# Altium PCB TelematicsBoardV1.PcbDoc
Units mm, origin at the board's own origin, x right, y up, seen from the top; angles counter-clockwise.
Board outline 68.4 x 70.55 mm, 2 copper layers (Top Layer, Bottom Layer); 24 components, 25 nets, 148 pads, 13 vias.
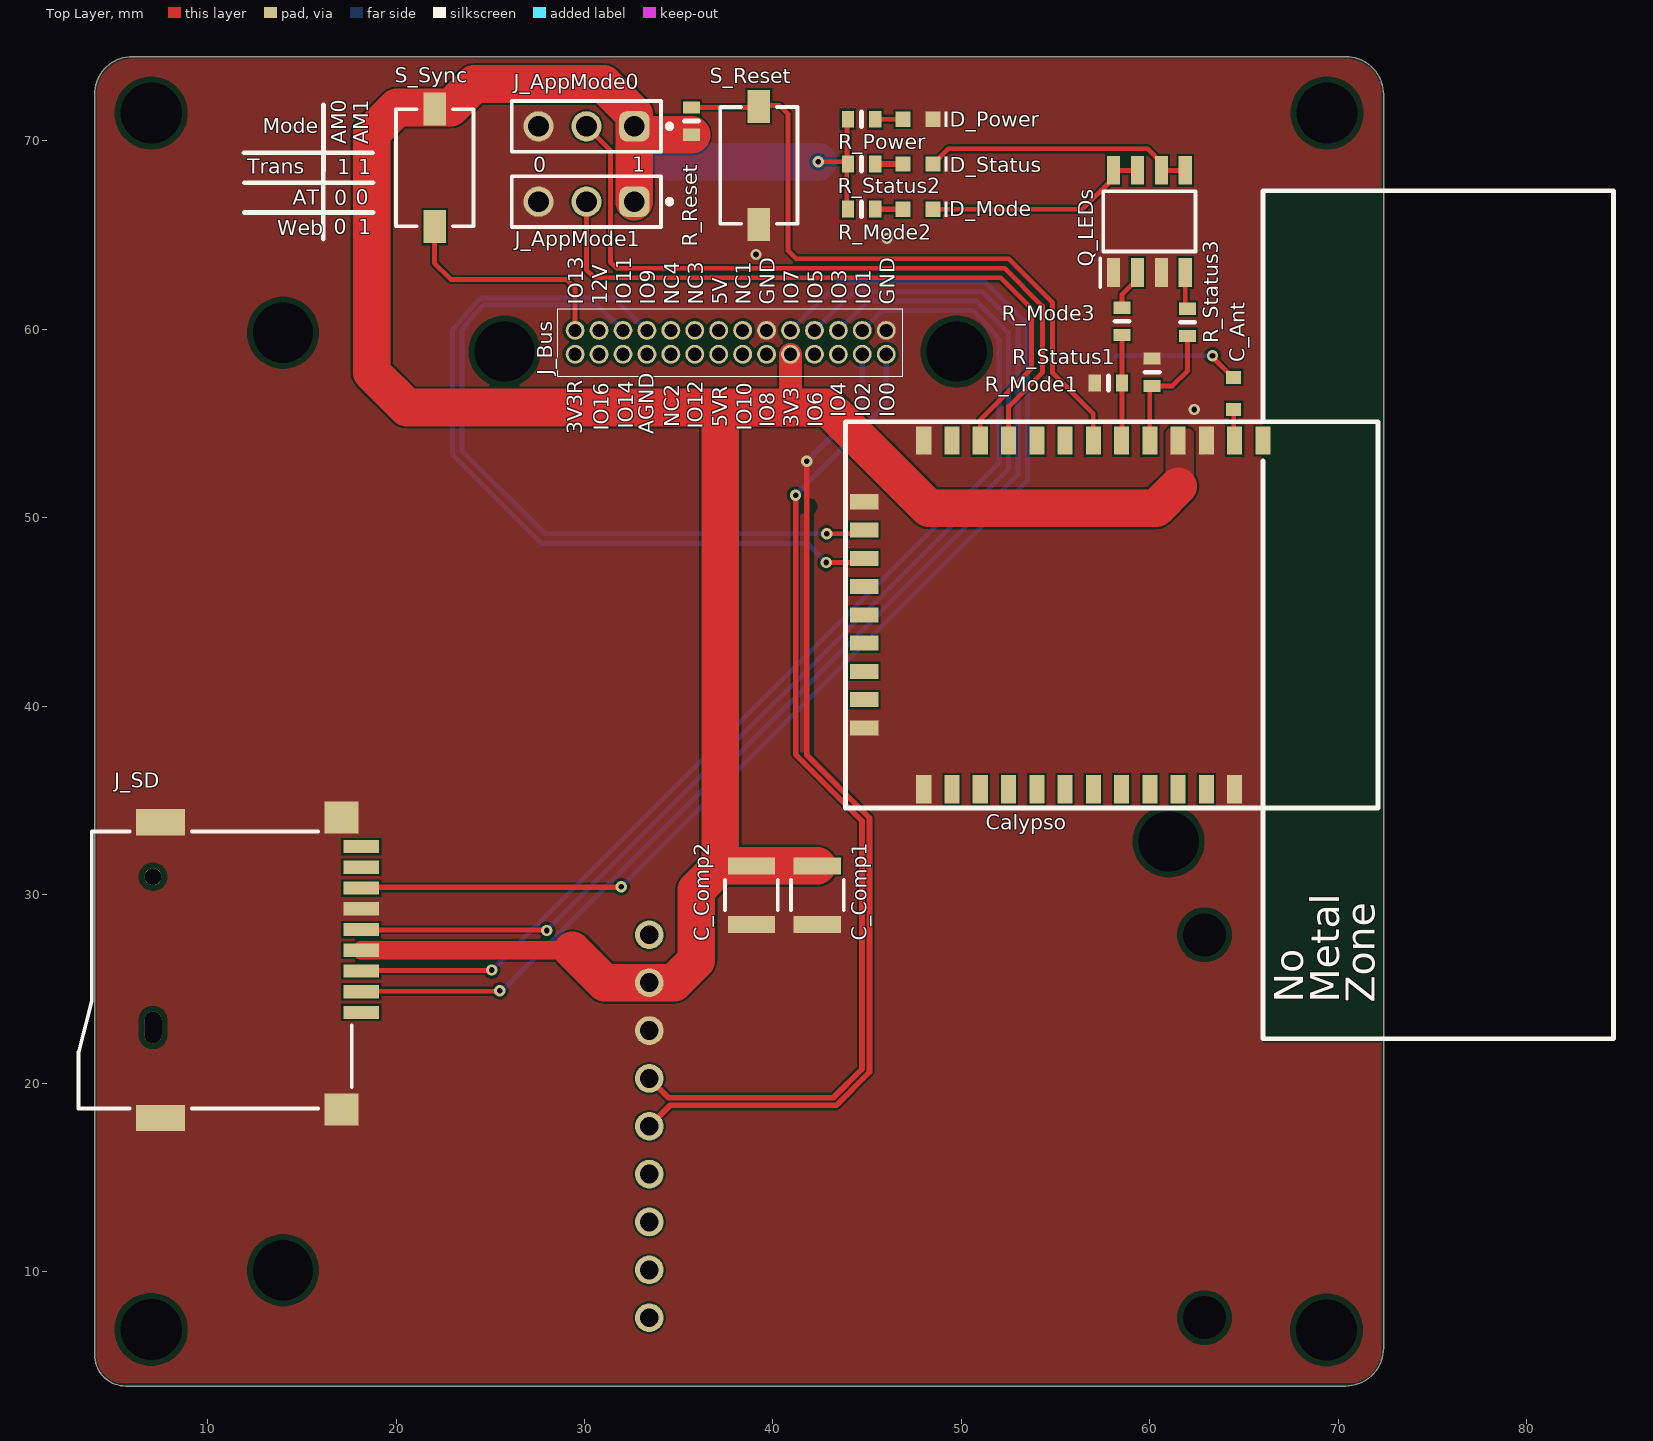
[diagram p0: Top Layer view]
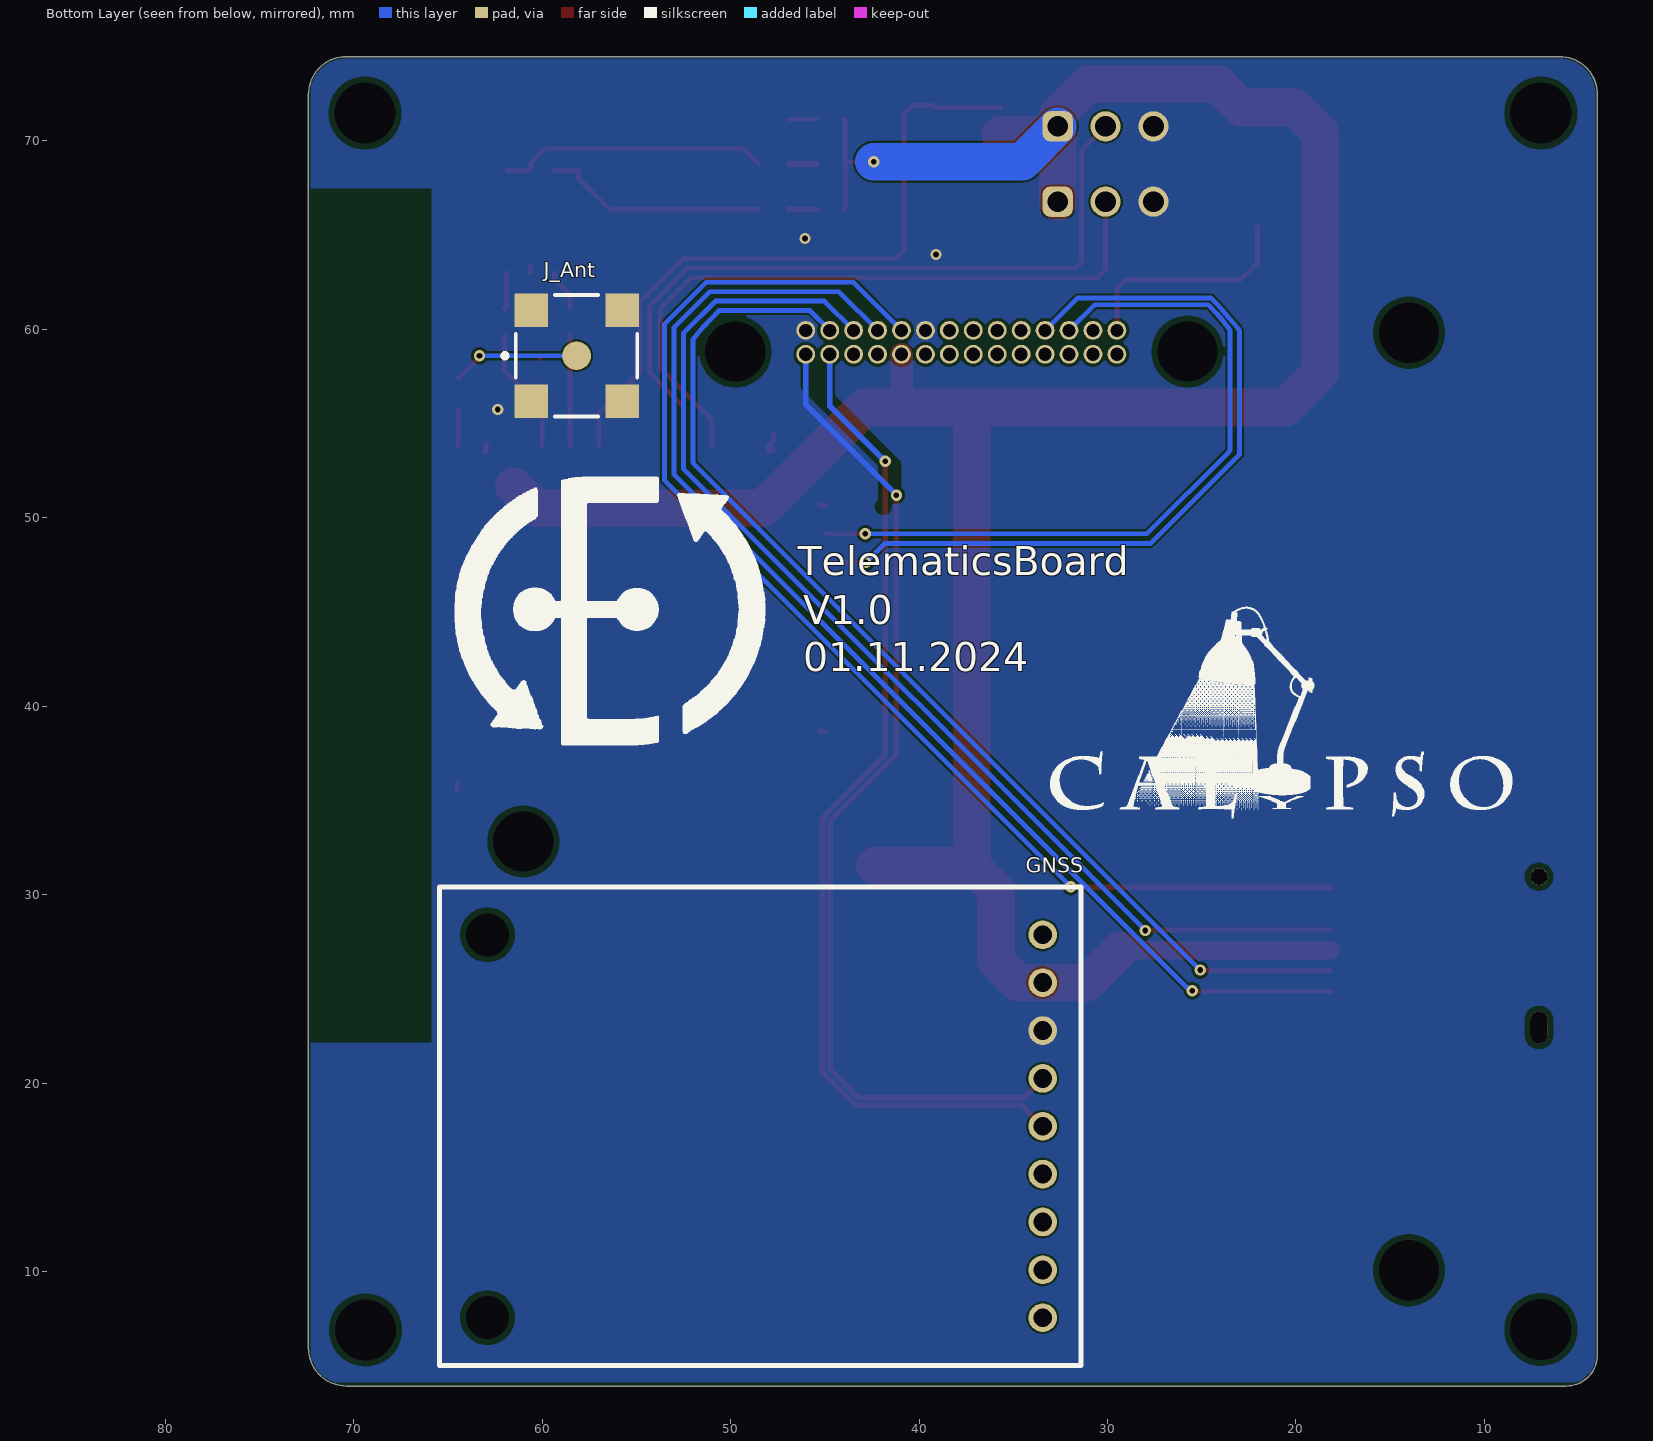
[diagram p1: Bottom Layer view, seen from below]
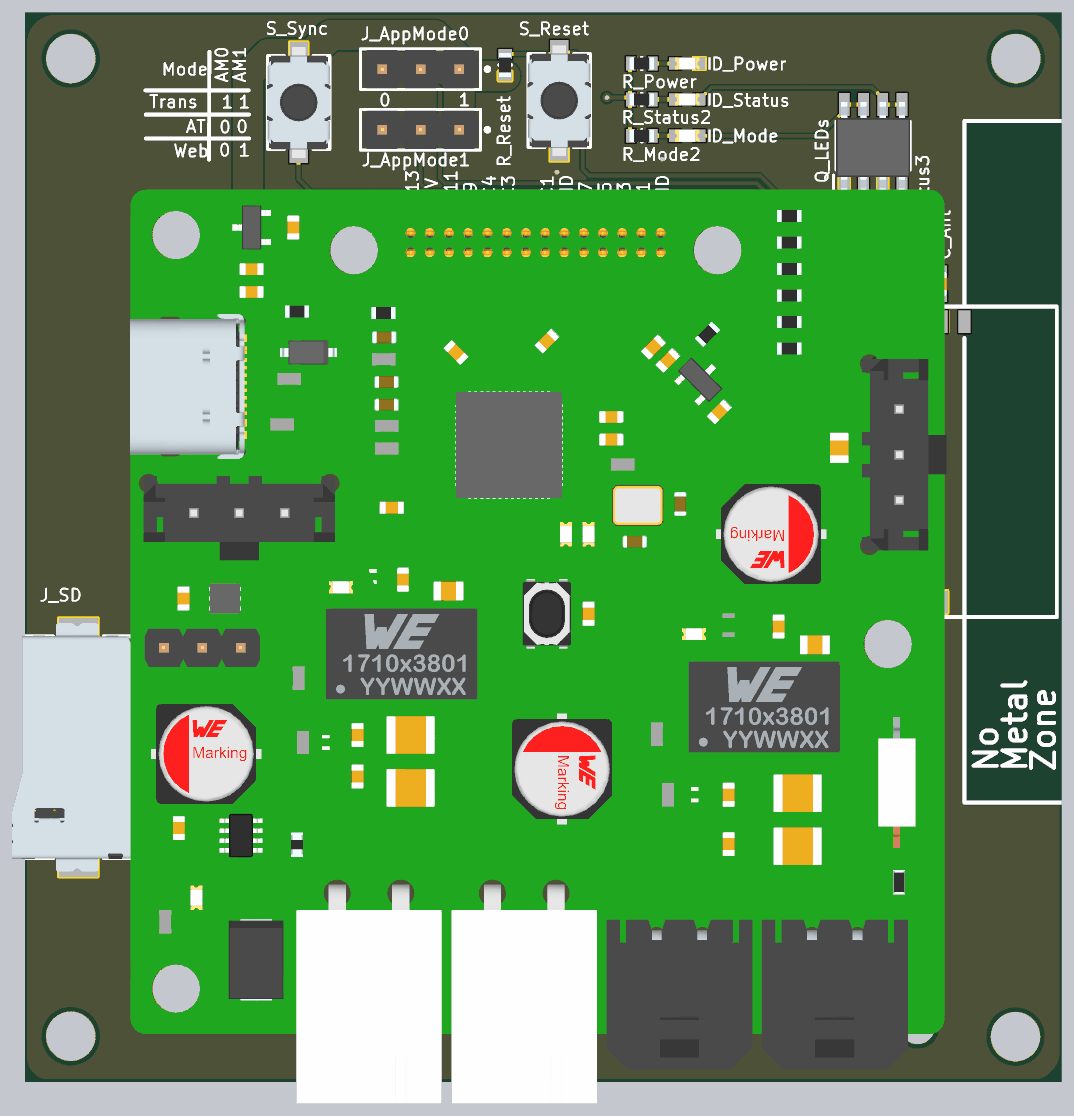
[diagram p2: 3D render of the assembled board from above, using the file's embedded part models]

## Layer stack, top to bottom
Top Solder: solder mask 0.0102, Solder Resist, Dk 3.5
Top Layer: signal copper 0.0356
Dielectric 1: dielectric 0.32, FR-4, Dk 4.8
Bottom Layer: signal copper 0.0356
Bottom Solder: solder mask 0.0102, Solder Resist, Dk 3.5

## Board outline
70.4,3.925 ccw(c70.4,5.925) 72.4,5.925 72.4,72.475 ccw(c70.4,72.475) 70.4,74.475 6,74.475 ccw(c6,72.475) 4,72.475 4,5.575 ccw(c5.65,5.575) 5.65,3.925

## Design rules (kind name [scope] priority, off if disabled: settings)
BoardOutlineClearance [(OnLayer('Bottom Layer') OR OnLayer('Top Layer'))] p1: gap=0.3 ignorepadtopadclearanceinfootprint=FALSE except(0: Arc-OutlineEdge Arc-CavityEdge Arc-CutoutEdge Arc-SplitBarrior Arc-SplitContinuation Text-OutlineEdge Text-CavityEdge Text-CutoutEdge Text-SplitBarrior Text-SplitContinuation; 0.1: Fill-OutlineEdge Fill-CavityEdge Fill-CutoutEdge Fill-SplitBarrior Fill-SplitContinuation Poly-OutlineEdge Poly-CavityEdge Poly-CutoutEdge Poly-SplitBarrior Poly-SplitContinuation Region-OutlineEdge Region-CavityEdge Region-CutoutEdge Region-SplitBarrior Region-SplitContinuation; 0.2: Via-OutlineEdge Via-CavityEdge Via-CutoutEdge Via-SplitBarrior Via-SplitContinuation)
Clearance [All] p1: gap=0.1 ignorepadtopadclearanceinfootprint=FALSE except(0.01: Text-Text Text-Hole; 0.09: SMDPad-SMDPad; 0.3: Arc-Hole Track-Hole SMDPad-Hole THPad-Hole Fill-Hole Poly-Hole Region-Hole)
HoleSize [All] p1: absolutevalues=TRUE maxlimit=5.3 minlimit=0.3 maxpercent=80.000 minpercent=20.000
MinimumAnnularRing [All] p1: minimumring=0.15
MinimumSolderMaskSliver [All] p1: minsoldermaskwidth=0.046
PlaneConnect [All] p1: planeconnectstyle=Direct reliefexpansion=0.508 reliefentries=4 reliefconductorwidth=0.254 reliefairgap=0.254
PolygonConnect [All] p1: connectstyle=Direct reliefconductorwidth=0.35 reliefentries=4 polygonreliefangle="90 Angle" airgapwidth=0.25
RoutingVias [All] p1: holewidth=0.3 width=0.6 viastyle="Through Hole" minholewidth=0.3 minwidth=0.6 maxholewidth=0.3 maxwidth=0.6
SilkToSilkClearance [All] p1: silktosilkclearance=0.01
SilkToSolderMaskClearance [IsPad] p1: minsilkscreentomaskgap=0.05 clearancetoexposedcopper=TRUE
SolderMaskExpansion SolderMaskExpansion_Via [IsVia] p1: expansion=0.102 istentingtop=TRUE
SolderMaskExpansion [All] p2: expansion=0.102 istentingtop=FALSE
UnRoutedNet [All] p1: checkbadconnections=TRUE
Width [All] p1: maxlimit=2 minlimit=0.15 preferedwidth=0.3
24 further rules are at their usual default settings.

## Components (designator, comment, footprint, x,y, rotation, side; value= is the part's Value field where it differs from the comment)
C_Ant "885012006053" WCAP-CSGP_0603_L1.6W0.8H0.8_Wave 64.45,56.6 r90 top
C_Comp1 "47u" WCAP-CSGP_1210_L3.2W2.5H2.5 42.35,29.976 r90 top
C_Comp2 "47u" WCAP-CSGP_1210_L3.2W2.5H2.5 38.85,29.976 r90 top
Calypso "Calypso" Calypso-Footprint-1 66,54 r180 top locked
D_Mode "150060YS75000" WL-SMCW_0603_150060xx75000 47.7,66.375 r180 top
D_Power "150060RS75000" WL-SMCW_0603_150060xx75000 47.7,71.15 r180 top
D_Status "150060VS75000" WL-SMCW_0603_150060xx75000 47.7,68.775 r180 top
GNSS "Ultimate GPS" "Ultimate GPS-Footprint-1" 31.404,5.01 r90 bottom locked
J_Ant "73251-1350" FP-73251-1350-MFG 58.175,58.6 r180 bottom
J_AppMode0 "61300311121" 61300311121 30.1,70.775 r180 top
J_AppMode1 "61300311121" 61300311121 30.1,66.775 r180 top
J_Bus "BusInterfaceV2_0" BusInterfaceV2_0 64.75,7.07 r90 top locked
J_SD "693071020811" 693071020811 10.4,26 r270 top
Q_LEDs "IRF7313TRPBFXTMA1" SOIC127P600X175-8N 59.975,65.725 r90 top
R_Mode1 "0603_100k" R_0603 57.8,57.15 r0 top
R_Mode2 "0603_2k2" R_0603 44.7,66.375 r180 top
R_Mode3 "0603_220R" R_0603 58.525,60.425 r90 top
R_Power "0603_2k2" R_0603 44.7,71.15 r180 top
R_Reset "0603_4k7" R_0603 35.675,71.05 r90 top
R_Status1 "0603_100k" R_0603 60.125,57.725 r270 top
R_Status2 "0603_2k2" R_0603 44.7,68.775 r180 top
R_Status3 "0603_220R" R_0603 62,60.375 r90 top
S_Reset "434781025816" WS-TASV_L6.2W4.1H2.5_4347x10258x6 39.25,68.7 r270 top
S_Sync "434781025816" WS-TASV_L6.2W4.1H2.5_4347x10258x6 22.05,68.575 r270 top

## Footprints (in the part's own frame and the unit in brackets; to place one, negate y for a bottom-side part, rotate by r counter-clockwise, add the part's x,y. Pads: shape width x height; smd on the part's side, far side on the other; paste and mask are expansions set on the pad)
61300311121 [mm] "Pin Header, pitch 2.54 mm, THT, Vertical, single row, 3p"
  rrect50% 1.6x1.6 hole 1.1: 1(-2.54,0)
  round 1.6 hole 1.1: 2(0,0) 3(2.54,0)
  silkscreen extent -4.53,-1.35 3.96,1.35, body extent -3.81,-1.27 3.81,1.27, height 8.57
693071020811 [mm] "Micro SD Card Connector Push & Push - with Card Detection - 8 Pins"
  rect 0.7x1.9 smd: 1(2.25,7.75) 2(1.15,7.75) 3(0.05,7.75) 4(-1.05,7.75) 5(-2.15,7.75) 6(-3.25,7.75) 7(-4.35,7.75) 8(-5.45,7.75) 9(-6.55,7.75)
  rect 1.7x1.8 smd: 10(-8.1,6.7) 11(7.4,6.7)
  rect 1.4x2.6 smd: 12(-7.85,-2.9) 13(7.85,-2.9)
  round 0.9 hole 0.9 unplated: MH1(-4.95,-3.3)
  oval 1.7x0.9 hole 0.9 slot 1.7 at 0 deg unplated: MH2(3.05,-3.3)
  silkscreen extent -7.35,-7.25 7.35,7.25, body extent -8.2,-7.3 8.2,7.73, height 1.85
BusInterfaceV2_0 [mm]
  round 1 hole 0.7: 1(52.875,18.74) 2(51.605,18.74) 3(52.875,20.01) 4(51.605,20.01) 5(52.875,21.28) 6(51.605,21.28) 7(52.875,22.55) 8(51.605,22.55) 9(52.875,23.82) 10(51.605,23.82) 11(52.875,25.09) 12(51.605,25.09) 13(52.875,26.36) 14(51.605,26.36) 15(52.875,27.63) 16(51.605,27.63) 17(52.875,28.9) 18(51.605,28.9) 19(52.875,30.17) 20(51.605,30.17) 21(52.875,31.44) 22(51.605,31.44) 23(52.875,32.71) 24(51.605,32.71) 25(52.875,33.98) 26(51.605,33.98) 27(52.875,35.25) 28(51.605,35.25)
  round 0 hole 3.2: ""(3,50.75) ""(25.75,3.75) ""(51.75,15) ""(51.75,39) ""(52.75,50.75)
  silkscreen extent 50.43,17.86 54.03,36.16, body extent -4.6,-0.07 55.75,53.82, height 17.33
Calypso-Footprint-1 [mm]
  rect 0.8x1.5 smd: 1(0,-0.1) 2(1.5,-0.1) 3(3,-0.1) 4(4.5,-0.1) 5(6,-0.1) 6(7.5,-0.1) 7(9,-0.1) 8(10.5,-0.1) 9(12,-0.1) 10(13.5,-0.1) 11(15,-0.1) 12(16.5,-0.1) 13(18,-0.1) 23(18,18.4) 24(16.5,18.4) 25(15,18.4) 26(13.5,18.4) 27(12,18.4) 28(10.5,18.4) 29(9,18.4) 30(7.5,18.4) 31(6,18.4) 32(4.5,18.4) 33(3,18.4) 34(1.5,18.4)
  rect 1.5x0.8 smd: 14(21.15,3.15) 15(21.15,4.65) 16(21.15,6.15) 17(21.15,7.65) 18(21.15,9.15) 19(21.15,10.65) 20(21.15,12.15) 21(21.15,13.65) 22(21.15,15.15)
  silkscreen extent -18.6,-13.35 22.15,31.65, body extent -6.05,-0.9 21.95,19.2, height 3
FP-73251-1350-MFG [mil]
  round 60 smd paste+0 mask+0: 1(0,0)
  rect 70x70 smd paste+0 mask+0: 2(-95,95) 3(95,95) 4(-95,-95) 5(95,-95)
  silkscreen extent -155,-127 127,127, body extent -125,-125 125,125, height 380
R_0603 [mm]
  rect 0.65x0.9 smd: 1(-0.725,0) 2(0.725,0)
  silkscreen extent 0,-0.38 0,0.38, body extent -0.8,-0.4 0.8,0.4, height 0.45
SOIC127P600X175-8N [mm]
  rect 1.525x0.7 smd: 1(-2.712,1.905) 2(-2.712,0.635) 3(-2.712,-0.635) 4(-2.712,-1.905) 5(2.712,-1.905) 6(2.712,-0.635) 7(2.712,0.635) 8(2.712,1.905)
  silkscreen extent -3.47,-2.45 1.6,2.61, body extent -3.13,-2.45 2.87,2.45, height 1.75
"Ultimate GPS-Footprint-1" [mil]
  round 60 hole 39.37 mask+0: 3V3(100,80) EN(200,80) FIX(400,80) GND(700,80) PPS(900,80) RX(600,80) TX(500,80) VBAT(300,80) VIN(800,80)
  round 0 hole 90 mask+0: Hole1(100,1240) Hole2(900,1240)
  silkscreen extent 0,0 1000,1340
WCAP-CSGP_0603_L1.6W0.8H0.8_Wave [mm] "Ceramic Capacitors, 0603, body 1.6x0.8mm"
  rect 0.7x0.8 smd: 1(-0.85,0) 2(0.85,0)
  body extent -0.8,-0.4 0.8,0.4, height 0.8
WCAP-CSGP_1210_L3.2W2.5H2.5 [mm] "Ceramic Capacitors, body 3.2x2.5mm"
  rect 0.9x2.5 smd: 1(-1.55,0) 2(1.55,0)
  silkscreen extent -0.8,-1.4 0.8,1.4, body extent -1.6,-1.25 1.6,1.25, height 2.5
WL-SMCW_0603_150060xx75000 [mm] "SMD Mono-color Chip LED, body 1.6x0.8mm"
  rect 0.8x0.8 smd: 1(-0.8,0) 2(0.8,0)
  silkscreen extent -1.55,-0.4 -1.4,0.4, body extent -0.8,-0.4 0.8,0.4, height 0.7
WS-TASV_L6.2W4.1H2.5_4347x10258x6 [mm] "SMT IP67 Tact Switch"
  rect 1.75x1.2 smd: 1(-3.125,0) 2(3.125,0)
  silkscreen extent -3.1,-2.05 3.1,2.05, body extent -3.65,-2.1 3.65,2.1, height 2.5

## Part data
C_Ant: library part CMP-006-000022-1, "WCAP-CSGP Multilayer Ceramic Chip Capacitor, General Purpose, size 0603, NP0, 22pF, 50VDC", Capacitance=22pF, Capacitance Tolerance=+/-5%, Case/Size Code=0603, Insulation Resistance=10GOhm, Manufacturer="Wurth Elektronik", Operating Temperature Max=125°C, Operating Temperature Min=-55°C, Rated Voltage (DC)=50V, Category="Multilayer Ceramic Chip Capacitors", Ceramic Type=NP0, Component Type=Standard, ComponentLink1Description="Website Link", ComponentLink1URL=https://www.we-online.com/redexpert/article/885012006053?ad, ComponentLink2Description="Datasheet Link", ComponentLink2URL=https://www.we-online.com/redexpert/spec/885012006053?ad, Design Item ID=885012006053, Height=0.8mm, Length=1.6mm, Manufacturer Part Number=885012006053, Match Code=WCAP-CSGP, Mount="Surface Mount", Packaging="Tape and Reel", Pin Count=2, Q Factor=840, Source=DefaultCeramicCaps.SchLib, Technical Reference=NP00603220J050DFCT10000, Width=0.8mm
C_Comp1 C_Comp2: library part CMP-006-000009-1, "WCAP-CSGP Multilayer Ceramic Chip Capacitor, General Purpose, size 1210, X5R, 47uF, 16VDC", Capacitance=47µF, Capacitance Tolerance=+/-20%, Case/Size Code=1210, Insulation Resistance=0.002GOhm, Manufacturer="Wurth Elektronik", Manufacturer Part Number=885012109011, Operating Temperature Max=85°C, Operating Temperature Min=-55°C, Rated Voltage (DC)=16V, Category="Multilayer Ceramic Chip Capacitors", Ceramic Type=X5R, Component Type=Standard, ComponentLink1Description="Website Link", ComponentLink1URL=https://www.we-online.com/redexpert/article/885012109011?ad, ComponentLink2Description="Datasheet Link", ComponentLink2URL=https://www.we-online.com/redexpert/spec/885012109011?ad, Design Item ID=885012109011, Dissipation Factor=10%, Height=2.5mm, Length=3.2mm, Match Code=WCAP-CSGP, Mount="Surface Mount", Packaging="Tape and Reel", Pin Count=2, Source=DefaultCeramicCaps.SchLib, Technical Reference=X5R1210476M016DFCT10000, Width=2.5mm
Calypso: library part CMP-002-000002-4, "WIRL-WIFS Calypso WIFI module", Manufacturer="Wuerth Elektronik", Manufacturer Part Number=2610011025000, MF=Würth, MF-PartNumber=2610011025000, Pin Count=34, Source=https://www.we-online.com/components/products/datasheet/2610011025000.pdf
D_Mode: library part CMP-008-000003-1, "WL-SMCW Mono-color Chip LED Waterclear, size 0603, Yellow, 2V, 140°", Case/Size Code=0603, Emitting Color=Yellow, Forward Voltage=2V, Manufacturer="Wurth Elektronik", Operating Temperature Max=85°C, Operating Temperature Min=-40°C, Category="Signal LEDs", Chip Technology=AlInGaP, Component Type=Standard, ComponentLink1Description="Website Link", ComponentLink1URL=https://www.we-online.com/redexpert/article/150060YS75000?ad, ComponentLink2Description="Datasheet Link", ComponentLink2URL=https://www.we-online.com/redexpert/spec/150060YS75000?ad, Design Item ID=150060YS75000, Dominant Wavelength=590nm, Height=0.7mm, Length=1.6mm, Luminous Intensity=120mcd, Manufacturer Part Number=150060YS75000, Match Code=WL-SMCW, Mount="Surface Mount", Packaging="Tape and Reel", Peak Wavelength=595nm, Pin Count=2, Source=Diodes.SchLib, Viewing Angle=140°, Width=0.8mm
D_Power: library part CMP-008-000001-1, "WL-SMCW Mono-color Chip LED Waterclear, size 0603, Red, 2V, 140°", Case/Size Code=0603, Emitting Color=Red, Forward Voltage=2V, Manufacturer="Wurth Elektronik", Operating Temperature Max=85°C, Operating Temperature Min=-40°C, Category="Signal LEDs", Chip Technology=AlInGaP, Component Type=Standard, ComponentLink1Description="Website Link", ComponentLink1URL=https://www.we-online.com/redexpert/article/150060RS75000?ad, ComponentLink2Description="Datasheet Link", ComponentLink2URL=https://www.we-online.com/redexpert/spec/150060RS75000?ad, Design Item ID=150060RS75000, Dominant Wavelength=625nm, Height=0.7mm, Length=1.6mm, Luminous Intensity=250mcd, Manufacturer Part Number=150060RS75000, Match Code=WL-SMCW, Mount="Surface Mount", Packaging="Tape and Reel", Peak Wavelength=630nm, Pin Count=2, Source=Diodes.SchLib, Viewing Angle=140°, Width=0.8mm
D_Status: library part CMP-008-000002-1, "WL-SMCW Mono-color Chip LED Waterclear, size 0603, Bright Green, 2V, 140°", Case/Size Code=0603, Emitting Color="Bright Green", Forward Voltage=2V, Manufacturer="Wurth Elektronik", Operating Temperature Max=85°C, Operating Temperature Min=-40°C, Category="Signal LEDs", Chip Technology=AlInGaP, Component Type=Standard, ComponentLink1Description="Website Link", ComponentLink1URL=https://www.we-online.com/redexpert/article/150060VS75000?ad, ComponentLink2Description="Datasheet Link", ComponentLink2URL=https://www.we-online.com/redexpert/spec/150060VS75000?ad, Design Item ID=150060VS75000, Dominant Wavelength=570nm, Height=0.7mm, Length=1.6mm, Luminous Intensity=40mcd, Manufacturer Part Number=150060VS75000, Match Code=WL-SMCW, Mount="Surface Mount", Packaging="Tape and Reel", Peak Wavelength=572nm, Pin Count=2, Source=Diodes.SchLib, Viewing Angle=140°, Width=0.8mm
GNSS: library part CMP-002-000003-1, "GPS Board by adafruit", Manufacturer=Adafruit, Manufacturer Part Number=746
J_Ant: library part CMP-04764-000006-1, "CONN SMA JACK STR 50 OHM SMD", Frequency=18GHz, Manufacturer=Molex, Temperature="-65°C to +165°C", Temperature Range High=+165°C, Temperature Range Low=-65°C, Voltage Rating=500V, Automotive=No, Category=Conn, ComponentLink2Description=Datasheet, ComponentLink2URL=https://www.molex.com/pdm_docs/sd/732511350_sd.pdf, Conn Orientation=Straight, Contact Material=Gold, Device Class L1=Connectors, Device Class L2="RF / Coaxial Connectors", Device Class L3=unset, Digikey Description="CONN SMA JACK STR 50 OHM SMD", Footprint Url=https://forum.upverter.com/uploads/default/original/3X/d/a/daeafa2ce4908d4fc4e49f0b17d7d2c986fce444.pdf, Height=9.655mm, Impedance=50Ω, Is Female=yes, Lead Free=Yes, Manufacturer Part Number=73251-1350, Mouser Description="RF Connectors / Coaxial Connectors SMA ST PCB-JCK STD SMT", Number Of Contacts=1, Octopart=https://octopart.com/73251-1350-molex-5414390, Package=73251-1350, RoHS=TRUE, Shielding=true, Standoff Height=0.41mm
J_AppMode0 J_AppMode1: library part CMP-1502-01062-3, Color=Black, Contact Resistance=20mΩ, Current Rating=3A, Manufacturer="Wuerth Elektronik", Max Operating Temperature=105°C, Min Operating Temperature=-40°C, Operating Supply Voltage=250V, Connector Type="Male Pin", Contact Material=Copper, Contact Mating Length=5.9944mm, Contact Plating=Gold, Gender=Male, Height=8.94mm, Lead Free="Lead Free", Lead Pitch=2.54mm, Manufacturer Part Number=61300311121, Mount="Through Hole", NexarPartId=32855521, Number Of Contacts=3, Number of Pins=3, Number of Positions=3, Number of Rows=1, Orientation=Vertical, Packaging=Bulk, Pitch=2.54mm, REACH SVHC=Unknown, RoHS=Compliant, Termination=Solder, Voltage Rating=250V
J_Bus: library part CMP-012-000011-1, "62202821121 needs to be soldered on the PCB", Manufacturer="Wuerth Elektronik", Manufacturer Part Number=62202821121, Component Type=Standard, Design Item ID=BusInterfaceV2_0, Manufacturer_Name="Wuerth Elektronik", Manufacturer_Part_Number=62202821121, Pin Count=28, Source=Ecogenium_Default_SchLibSchLib.SchLib
J_SD: library part CMP-03913-107725714-1, "693071020811 Micro Sd Card, Push-Push, 8Pos, Smt Rohs Compliant: Yes", Current Rating=500mA, Insulation Resistance=100MΩ, Manufacturer="Wuerth Elektronik", Max Operating Temperature=85°C, Min Operating Temperature=-40°C, Manufacturer Part Number=693071020811, NexarPartId=107725714, Number of Pins=8, Packaging="Tape and Reel", RoHS=Compliant
Q_LEDs: library part CMP-012-000004-1, "MOSFET PLANAR 40<-<100V / N Channel / Two Channel", Manufacturer=Infineon, Mouser Part Number=726-IRF7313TRPBFXTMA, Arrow Part Number=IRF7313TRPBFXTMA1, Arrow Price/Stock=https://www.arrow.com/en/products/irf7313trpbfxtma1/infineon-technologies-ag?region=europe, Component Type=Standard, Datasheet Link=https://www.mouser.co.uk/datasheet/2/196/Infineon_IRF7313_DataSheet_v01_01_EN-3224007.pdf, Design Item ID=IRF7313TRPBFXTMA1, Geometry.Height=1.75mm, Manufacturer Part Number=IRF7313TRPBFXTMA1, Manufacturer_Name=Infineon, Manufacturer_Part_Number=IRF7313TRPBFXTMA1, Mouser Price/Stock=https://www.mouser.co.uk/ProductDetail/Infineon-Technologies/IRF7313TRPBFXTMA1?qs=1Kr7Jg1SGW%2FUB%252Bqt0Ezjig%3D%3D, Pin Count=8, Source=ActiveComponents.SchLib
R_Mode1 R_Status1: library part CMP-010-000001-1, "100k Ohm, 0603.", Manufacturer=Royalohm, Manufacturer Part Number=0603WAJ0104T5E, Component Type=Standard, Design Item ID=0603_100k, Geometry.Height=0.5mm, Manufacturer_Name=Royalohm, Manufacturer_Part_Number=0603WAJ0104T5E, Pin Count=2, Source=Resistors.SchLib
R_Mode2 R_Power R_Status2: library part CMP-010-000012-1, "2,2k Ohm, 0603.", Manufacturer=Royalohm, Manufacturer Part Number=0603WAJ0222T5E, Component Type=Standard, Design Item ID=0603_2k2, Geometry.Height=0.5mm, Manufacturer_Name=Royalohm, Manufacturer_Part_Number=0603WAJ0222T5E, Pin Count=2, Source=Resistors.SchLib
R_Mode3 R_Status3: library part CMP-010-000010-1, "220 Ohm, 0603.", Manufacturer=Royalohm, Manufacturer Part Number=0603WAJ0221T5E, Component Type=Standard, Design Item ID=0603_220R, Geometry.Height=0.5mm, Manufacturer_Name=Royalohm, Manufacturer_Part_Number=0603WAJ0221T5E, Pin Count=2, Source=Resistors.SchLib
R_Reset: library part CMP-010-000016-1, "4,7k Ohm, 0603.", Manufacturer=Royalohm, Manufacturer Part Number=CQ03SAF4701T5E, Component Type=Standard, Design Item ID=0603_4k7, Geometry.Height=0.5mm, Manufacturer_Name=Royalohm, Manufacturer_Part_Number=CQ03SAF4701T5E, Pin Count=2, Source=Resistors.SchLib
S_Reset S_Sync: library part CMP-011-000002-1, "WS-TASV SMT IP67 Tact Switch, L6.2 x W4.1 x H2.5mm, 160g, SPST-NO, 12V, 50mA", Manufacturer="Wurth Elektronik", Operating Temperature Max=85°C, Operating Temperature Min=-40°C, Rated Current=50mA, Rated Voltage (DC)=12V, Category="Tact Switches", Circuit=SPST-NO, Component Type=Standard, ComponentLink1Description="Website Link", ComponentLink1URL=https://www.we-online.com/redexpert/article/434781025816?ad, ComponentLink2Description="Datasheet Link", ComponentLink2URL=https://www.we-online.com/redexpert/spec/434781025816?ad, Contact Material="Stainless Steel", Contact Plating=Silver, Design Item ID=434781025816, Height=2.5mm, Length=6.2mm, Manufacturer Part Number=434781025816, Match Code=WS-TASV, Mount="Surface Mount", Operation Force=160g, Packaging="Tape and Reel", Pin Count=2, Source=Electromechanical.SchLib, Terminal Material="Copper Alloy", Terminal Plating=Silver, Washable=Yes, Width=4.1mm

## Free pads (board coordinates)
  round 0 hole 3.25 mask+0: 2(7,6.925) 2(7,71.475) 2(69.375,6.9) 2(69.4,71.475)

## Via types
v1: diameter 0.6, hole 0.3, Top Layer to Bottom Layer, tented both sides, 13 vias

## Nets (pads, with @x,y where several pads share a name; then routed paths per layer and width w, separated by ;. In a path a pad name is that pad's centre, name@x,y a point inside that pad or via, vN(x,y) a via of type N, cw(c..) or ccw(c..) an arc to the next point about the centre after c; other vN are vias at no path point)
3V3: C_Comp1.2 C_Comp2.2 Calypso.4 GNSS.VIN J_AppMode0.1 J_AppMode1.1 J_Bus.10 J_SD.4 R_Mode2.2 R_Power.2 R_Reset.1 R_Status2.2 S_Sync.1 | length 156.5
  Top Layer w0.254: R_Reset.1@35.586,70.414 R_Reset.1 ; v1(42.4,68.9) 43.85,68.9 R_Status2.2@43.925,68.825 ; R_Mode2.2@43.95,66.375 43.913,66.412 43.913,68.738 43.875,68.775 R_Status2.2@43.925,68.825 ; R_Power.2 43.925,71.1 R_Status2.2@43.925,68.825
  Top Layer w1: J_SD.4 29.35,27.05
  Top Layer w1.2: 40.93,55.92 J_Bus.10
  Top Layer w2: 29.35,27.05 31.07,25.33 GNSS.VIN 34.753,25.33 35.925,26.502 35.925,30.251 37.2,31.526 ; J_AppMode1.1 J_AppMode0.1 ; R_Reset.1 33.09,70.325 J_AppMode0.1 ; 40.93,55.92 41,55.85 ; C_Comp1.2 C_Comp2.2 37.2,31.526 ; 61.5,51.672 60.328,50.5 48.275,50.5 42.925,55.85 41,55.85 ; J_AppMode0.1 32.64,71.403 31.018,73.025 24.15,73.025 22.9,71.775 20.051,71.775 18.7,70.424 18.7,57.725 20.575,55.85 37.2,55.85 ; 37.2,31.526 37.2,55.85 ; 37.2,55.85 41,55.85
  Bottom Layer w0.254: v1@42.375,68.875 v1(42.4,68.9)
  Bottom Layer w2: J_AppMode0.1 34.515,68.9 v1(42.4,68.9)
GND: C_Comp1.1 C_Comp2.1 Calypso.3 Calypso.13 Calypso.14 Calypso.22 Calypso.23 Calypso.34 D_Power.1 GNSS.GND J_Ant.2 J_Ant.3 J_Ant.4 J_Ant.5 J_AppMode0.3 J_AppMode1.3 J_Bus.1 J_Bus.11 J_SD.6 J_SD.10 J_SD.11 J_SD.12 J_SD.13 Q_LEDs.1 Q_LEDs.3 R_Mode1.1 R_Status1.1 S_Reset.2 | length 3.9
  Top Layer w0.254: Calypso.22@44.95,38.675 Calypso.22@45.3,38.675 ; Calypso.14@44.95,50.675 Calypso.14@45.3,50.675 ; Calypso.13@47.727,53.552 Calypso.13@48,53.825 ; Calypso.13@47.727,54.473 47.727,54.098 Calypso.13@48,53.825 ; Calypso.13@48,53.475 Calypso.13@48,53.825 ; Q_LEDs.1 Q_LEDs.1@58.07,63.425 ; R_Status1.1 R_Status1.1@60.133,58.458 ; Q_LEDs.3@60.61,63.425 Q_LEDs.3 Q_LEDs.3@60.617,63.006 ; Calypso.3@62.913,53.912 63,53.825 Calypso.3@63,53.475 ; Calypso.34@64.5,35.525 Calypso.34@64.5,35.875
  other v1: 62.35,55.75 39.1,63.975 46.05,64.825
NetC_Ant_1: C_Ant.1 Calypso.2 | length 1.9
  Top Layer w0.254: C_Ant.1 64.45,53.875 Calypso.2@64.5,53.825
NetC_Ant_2: C_Ant.2 J_Ant.1 | length 6.8
  Top Layer w0.254: v1(63.325,58.6) 63.325,58.525 64.4,57.45 C_Ant.2
  Bottom Layer w0.254: J_Ant.1@58.175,58.55 58.225,58.6 v1(63.325,58.6)
NetCalypso_5: Calypso.5 R_Status1.2 R_Status3.1 | length 7.3
  Top Layer w0.254: Calypso.5@60,53.825 60,56.875 R_Status1.2 61.2,57 62,57.8 R_Status3.1
NetCalypso_6: Calypso.6 R_Mode1.2 R_Mode3.1 | length 5.9
  Top Layer w0.254: Calypso.6@58.5,53.825 58.525,53.85 R_Mode1.2 R_Mode3.1
NetCalypso_7: Calypso.7 R_Reset.2 S_Reset.1 | length 36.3
  Top Layer w0.254: R_Reset.2 39.15,71.775 39.25,71.875 40.35,71.875 40.8,71.425 40.8,64.175 41.226,63.749 52.508,63.749 54.84,61.416 54.84,57.685 57,55.525 Calypso.7@57,53.825
NetCalypso_10: Calypso.10 J_AppMode0.2 | length 39.8
  Top Layer w0.254: J_AppMode0.2 31.375,69.5 31.375,63.575 31.709,63.241 52.297,63.241 54.3,61.238 54.3,57.7 52.5,55.9 Calypso.10@52.5,53.825
NetCalypso_11: Calypso.11 J_AppMode1.2 | length 36.5
  Top Layer w0.254: J_AppMode1.2 30.1,63.175 30.542,62.733 52.087,62.733 53.725,61.095 53.725,57.925 51,55.2 Calypso.11@51,53.825
NetCalypso_15: Calypso.15 J_Bus.23 | length 39.4
  Top Layer w0.254: v1(42.85,49.15) 44.925,49.15 Calypso.15@44.95,49.175
  Bottom Layer w0.254: J_Bus.23 30.753,61.232 30.679,61.306 24.651,61.306 24.577,61.232 ccw(c32.932,53.024) 23.55,60.035 ccw(c23.754,59.883) 23.5,59.885 23.5,53.559 23.574,53.484 27.909,49.15 v1(42.85,49.15)
NetCalypso_16: Calypso.16 J_Bus.21 | length 42.7
  Top Layer w0.254: v1(42.821,47.626) 44.901,47.626 Calypso.16@44.95,47.675
  Bottom Layer w0.254: J_Bus.21 31.597,61.658 31.589,61.66 24.505,61.66 24.43,61.586 24.327,61.482 24.283,61.439 24.198,61.35 ccw(c32.932,53.024) 23.758,60.861 23.084,60.072 23.035,59.989 23,59.93 23,59.861 23,53.34 27.698,48.642 41.805,48.642 v1(42.821,47.626)
NetD_Mode_1: D_Mode.1 Q_LEDs.7 Q_LEDs.8 | length 11.9
  Top Layer w0.254: D_Mode.1 56.42,66.375 58.07,68.025 Q_LEDs.8 Q_LEDs.7
NetD_Mode_2: D_Mode.2 R_Mode2.1 | length 1.5
  Top Layer w0.3: R_Mode2.1 D_Mode.2
NetD_Power_2: D_Power.2 R_Power.1 | length 1.5
  Top Layer w0.254: R_Power.1 D_Power.2
NetD_Status_1: D_Status.1 Q_LEDs.5 Q_LEDs.6 | length 14.4
  Top Layer w0.254: D_Status.1 49.306,69.581 59.879,69.581 60.61,68.849 Q_LEDs.6 Q_LEDs.5
NetD_Status_2: D_Status.2 R_Status2.1 | length 1.5
  Top Layer w0.3: R_Status2.1 D_Status.2
NetGNSS_RX: GNSS.RX J_Bus.2 | length 53.7
  Top Layer w0.3: GNSS.RX 34.461,19.225 43.2,19.225 44.725,20.75 44.725,33.909 41.2,37.434 v1@41.2,51.174
  Bottom Layer w0.3: v1@41.2,51.211 46.01,56.02 J_Bus.2
  other v1: 41.2,51.2
NetGNSS_TX: GNSS.TX J_Bus.4 | length 53.6
  Top Layer w0.3: GNSS.TX 34.551,18.825 43.366,18.825 45.125,20.584 45.125,34.075 41.8,37.4 v1(41.8,53)
  Bottom Layer w0.3: v1(41.8,53) 44.74,55.94 J_Bus.4
NetJ_Bus_3: J_Bus.3 J_SD.3 | length 59.9
  Top Layer w0.254: J_SD.3 18.175,25.975 25.052,25.975 v1(25.077,26)
  Bottom Layer w0.254: v1(25.077,26) 52,52.923 52,59.457 ccw(c44.284,53.707) 51.089,60.511 50.6,61 45.79,61 J_Bus.3@44.74,59.95
NetJ_Bus_5: J_Bus.5 J_SD.5 | length 62.1
  Top Layer w0.254: J_SD.5 18.175,28.125 27.968,28.125 v1(27.993,28.1)
  Bottom Layer w0.254: v1(27.993,28.1) 52.5,52.607 52.5,59.8 50.8,61.5 45.02,61.5 J_Bus.5@43.47,59.95
NetJ_Bus_7: J_Bus.7 J_SD.2 | length 66.5
  Top Layer w0.254: J_SD.2 18.175,24.825 18.225,24.875 25.475,24.875 v1(25.5,24.9)
  Bottom Layer w0.254: v1(25.5,24.9) 25.594,24.9 25.767,25.073 25.782,25.073 38.409,37.7 53,52.291 53,60.1 51.1,62 44.25,62 J_Bus.7@42.2,59.95
NetJ_Bus_9: J_Bus.9 J_SD.7 | length 67.2
  Top Layer w0.3: J_SD.7 18.187,30.387 31.912,30.387 v1(31.949,30.424)
  Bottom Layer w0.254: v1(31.949,30.424) 53.5,51.975 53.5,60.3 51.3,62.5 43.48,62.5 J_Bus.9@40.93,59.95
NetJ_Bus_27: J_Bus.27 S_Sync.2 | length 12.2
  Top Layer w0.254: S_Sync.2@22.032,65.499 22.032,63.518 22.9,62.65 29.025,62.65 29.5,62.175 J_Bus.27
NetQ_LEDs_2: Q_LEDs.2 R_Mode3.2 | length 2.2
  Top Layer w0.254: R_Mode3.2 58.525,61.856 59.046,62.377 59.117,62.377 59.34,62.6 Q_LEDs.2
NetQ_LEDs_4: Q_LEDs.4 R_Status3.2 | length 2
  Top Layer w0.254: Q_LEDs.4 61.88,61.22 R_Status3.2
pads on no net: Calypso.1 Calypso.8 Calypso.9 Calypso.12 Calypso.17 Calypso.18 Calypso.19 Calypso.20 Calypso.21 Calypso.24 Calypso.25 Calypso.26 Calypso.27 Calypso.28 Calypso.29 Calypso.30 Calypso.31 Calypso.32 Calypso.33 GNSS.3V3 GNSS.EN GNSS.FIX GNSS.Hole1 GNSS.Hole2 GNSS.PPS GNSS.VBAT J_Bus. J_Bus.6 J_Bus.8 J_Bus.12 J_Bus.13 J_Bus.14 J_Bus.15 J_Bus.16 J_Bus.17 J_Bus.18 J_Bus.19 J_Bus.20 J_Bus.22 J_Bus.24 J_Bus.25 J_Bus.26 J_Bus.28 J_SD.1 J_SD.8 J_SD.9 J_SD.MH1 J_SD.MH2

## Polygon pours and split planes (outlines as drawn)
GND on Top Layer "GND_L01_P003" (solid, pour order 3): 4.098,74.65 72.498,74.65 72.498,67.475 65.973,67.475 65.97,22.146 72.498,22.146 72.498,4.1 4.1,4.1 4.048,54.525
3V3 on Top Layer "3V3_L01_P000" (solid, pour order 0): 61.02,54.736 62.13,54.736 62.325,54.541 62.325,51.672 60.85,51.672 60.85,52.025 60.85,54.566
GND on Bottom Layer "GND_L02_P001" (solid, pour order 1): 3.992,74.65 72.392,74.65 72.392,67.475 65.867,67.475 65.864,22.146 72.392,22.146 72.392,4.125 3.994,4.125 3.942,54.525

## Silkscreen, mask and mechanical layers (free items; w line width, h text height)
Top Overlay:
  lines w0.254: 11.925,69.375 18.75,69.375 ; 11.95,66.2 18.775,66.2 ; 11.95,67.775 18.775,67.775 ; 16.131,64.8 16.153,71.925
  text "Mode" at 12.925,70.4 h0.8
  text "AM0" at 17.35,69.825 h0.8 r90
  text "AM1" at 18.525,69.825 h0.8 r90
  text "1" at 32.525,68.375 h0.8
  text "0" at 27.275,68.35 h0.8
  text "Trans" at 12.1,68.25 h0.8
  text "1" at 16.875,68.225 h0.8
  text "1" at 18,68.225 h0.8
  text "AT" at 14.525,66.625 h0.8
  text "0" at 17.85,66.6 h0.8
  text "0" at 16.725,66.575 h0.8
  text "0" at 16.7,65.05 h0.8
  text "1" at 18,65.05 h0.8
  text "Web" at 13.7,65 h0.8
  text "No" at 68.146,24.254 h1.52 r90
  text "Metal" at 70.046,24.254 h1.52 r90
  text "Zone" at 71.946,24.254 h1.52 r90
Bottom Overlay:
  drawing of 4613 lines, arcs and shapes, not listed
  text "TelematicsBoard" at 46.446,46.954 h1.52
  text "V1.0" at 46.146,44.354 h1.52
  text "01.11.2024" at 46.146,41.854 h1.52

## Text inside footprints (layer, text, board x,y; h text height)
Calypso: Top Overlay "No Metal Zone" at 93.154,59.846 h1.52 r270
J_Bus: Top Overlay "GND" at 46.45,61.295 h0.8 r90; Top Overlay "IO1" at 45.18,61.295 h0.8 r90; Top Overlay "IO3" at 43.91,61.295 h0.8 r90; Top Overlay "IO5" at 42.64,61.295 h0.8 r90; Top Overlay "IO7" at 41.37,61.295 h0.8 r90; Top Overlay "GND" at 40.1,61.295 h0.8 r90; Top Overlay "NC1" at 38.83,61.295 h0.8 r90; Top Overlay "5V" at 37.56,61.295 h0.8 r90; Top Overlay "NC3" at 36.29,61.295 h0.8 r90; Top Overlay "NC4" at 35.02,61.295 h0.8 r90; Top Overlay "IO9" at 33.75,61.295 h0.8 r90; Top Overlay "IO11" at 32.48,61.295 h0.8 r90; Top Overlay "12V" at 31.21,61.295 h0.8 r90; Top Overlay "IO13" at 29.94,61.295 h0.8 r90; Top Overlay "IO0" at 46.475,55.325 h0.8 r90; Top Overlay "IO2" at 45.175,55.325 h0.8 r90; Top Overlay "IO4" at 43.875,55.325 h0.8 r90; Top Overlay "IO6" at 42.64,54.795 h0.8 r90; Top Overlay "3V3" at 41.37,54.795 h0.8 r90; Top Overlay "IO8" at 40.1,54.795 h0.8 r90; Top Overlay "IO10" at 38.875,54.625 h0.8 r90; Top Overlay "5VR" at 37.56,54.795 h0.8 r90; Top Overlay "IO12" at 36.275,54.725 h0.8 r90; Top Overlay "NC2" at 35.02,54.795 h0.8 r90; Top Overlay "AGND" at 33.675,54.425 h0.8 r90; Top Overlay "IO14" at 32.575,54.725 h0.8 r90; Top Overlay "IO16" at 31.275,54.625 h0.8 r90; Top Overlay "3V3R" at 29.875,54.425 h0.8 r90